# EAGLE board cv08_dobes (EAGLE 7.7.0)
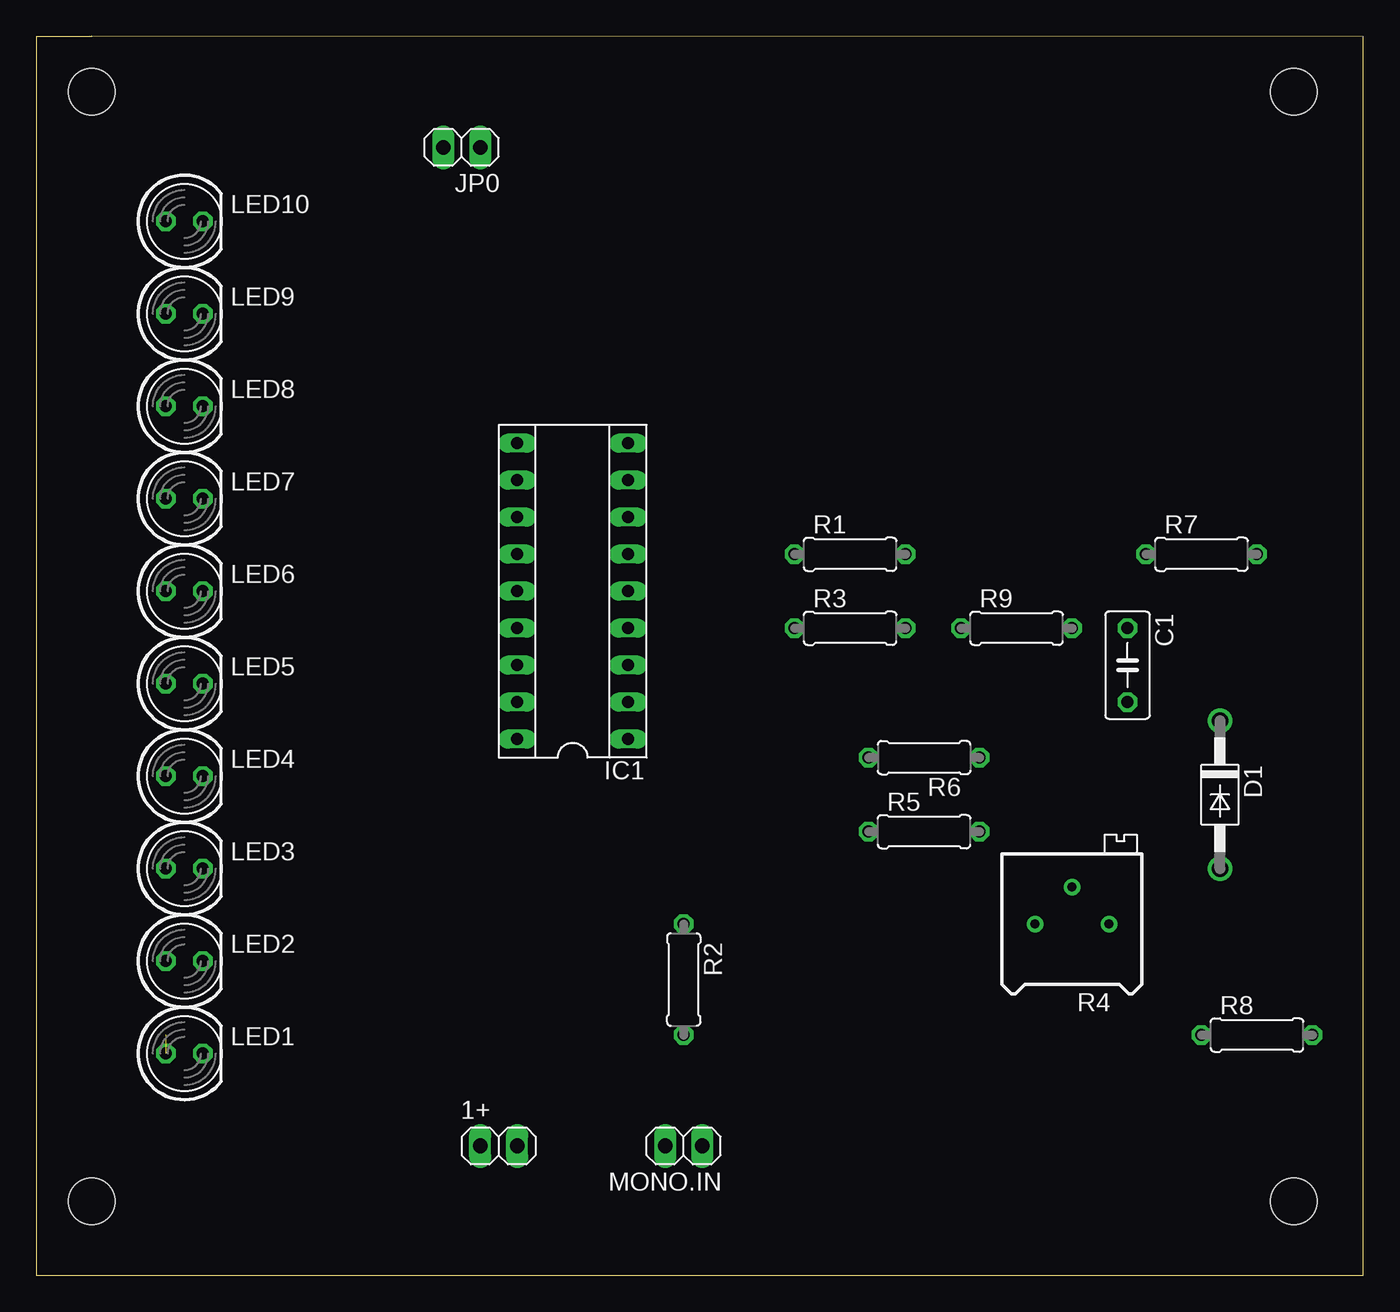
[diagram p0: board, top side]
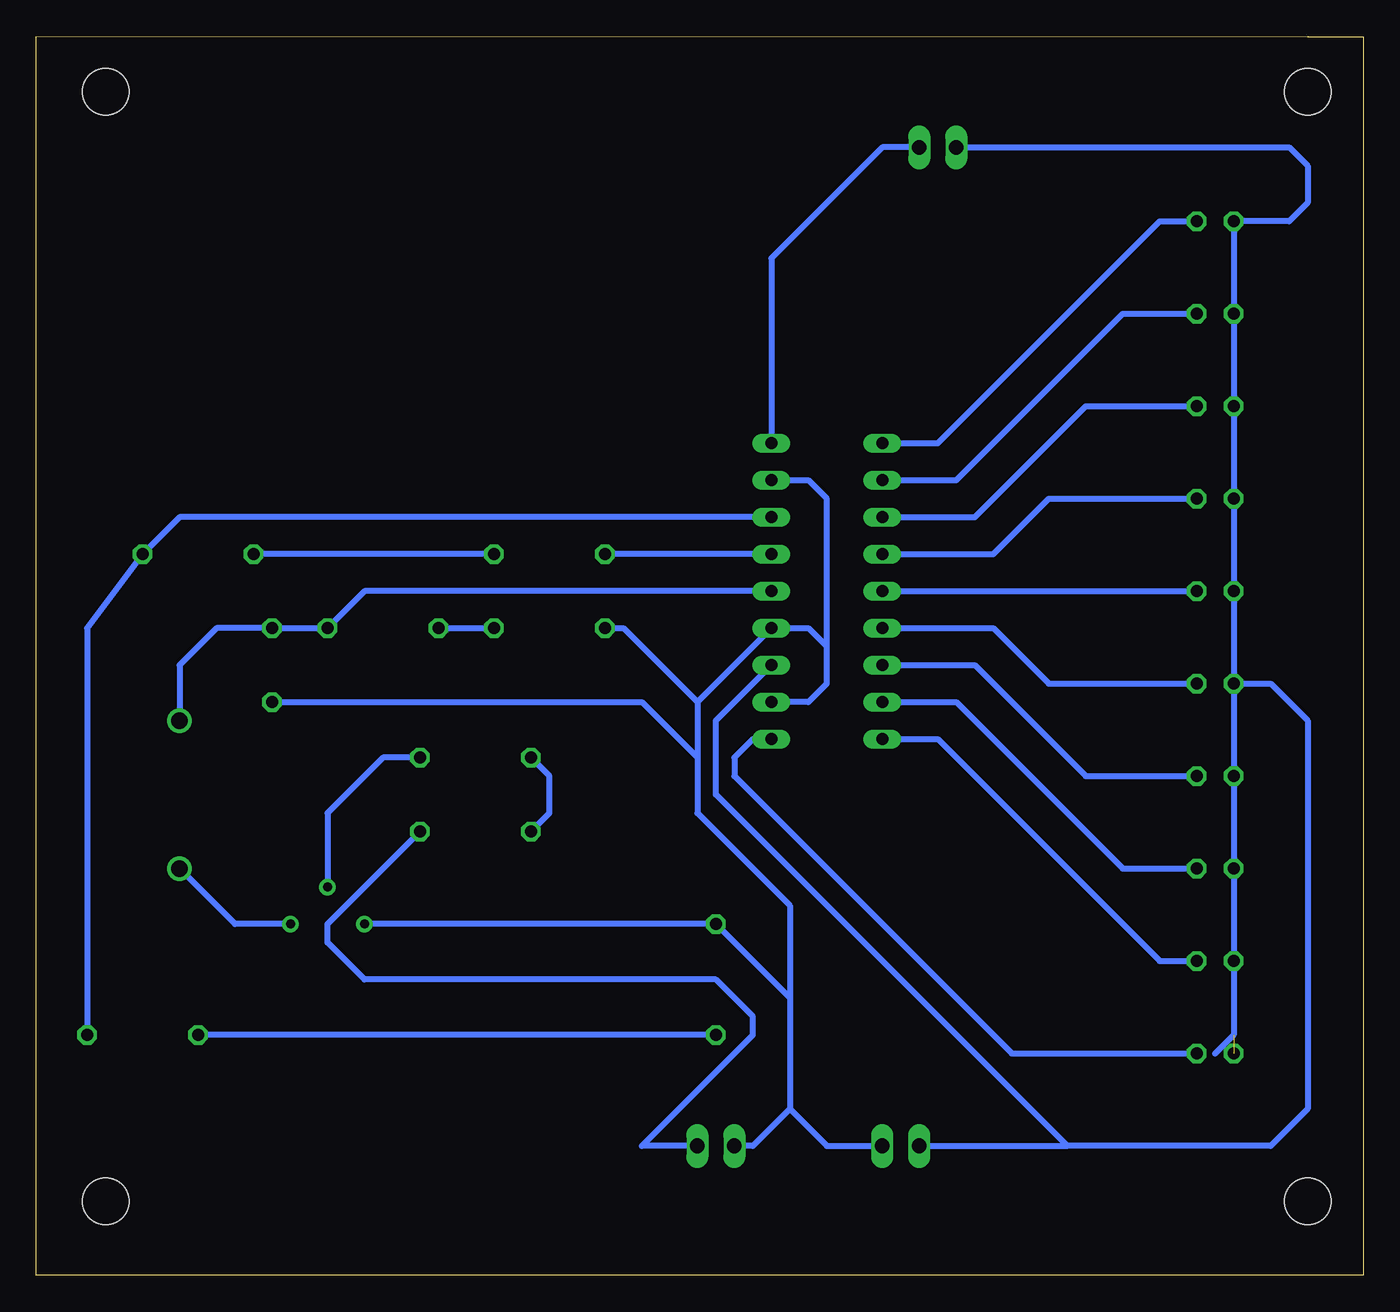
[diagram p1: board, bottom side, seen from below]

Size 91.11 x 85.09 mm. Coordinates in mm from the lower left corner, seen from the top.
Outline: 0,0 91.11,0 91.11,85.08 3.81,85.09 3.81,85.08 0,85.08 0,0
Copper layers (1*16): Top 0.035mm / dielectric 1.5mm / Bottom 0.035mm
Design rules "default": minimum track width 10mil, minimum drill 24mil, track to track 8mil, track to pad 8mil, pad to pad 8mil, via to via 8mil, smd to smd 8mil, copper to edge 40mil, drill to drill 8mil, minimum pad ring 10mil, minimum via ring 8mil, stop-mask expansion 4mil, vias tented up to drill 0mil, thermal gap 10mil
Holes 3.2 mm at 3.81,81.28 86.36,81.28 86.36,5.08 3.81,5.08

## Footprints (pad centres in the part's own frame; a part is rotated, then mirrored left to right if it is on the bottom)
1X02 = drill 1.016 long: 1 -1.27,0; 2 1.27,0
C050-030X075 = drill 0.813 octagon: 1 -2.54,0; 2 2.54,0
DO41-10 = drill 1.118: A 5.08,0; C -5.08,0
SOCKET-18 = drill 0.813 long: 1 -10.16,-3.81; 2 -7.62,-3.81; 3 -5.08,-3.81; 4 -2.54,-3.81; 5 0,-3.81; 6 2.54,-3.81; 7 5.08,-3.81; 8 7.62,-3.81; 9 10.16,-3.81; 10 10.16,3.81; 11 7.62,3.81; 12 5.08,3.81; 13 2.54,3.81; 14 0,3.81; 15 -2.54,3.81; 16 -5.08,3.81; 17 -7.62,3.81; 18 -10.16,3.81
LED5MM = drill 0.813 octagon: A -1.27,0; K 1.27,0
0207/7 = drill 0.813 octagon: 1 -3.81,0; 2 3.81,0
RTRIM64P = drill 0.61: 1 0,-2.54; 2 2.54,0; 3 0,2.54

## Placement (x,y rotation side)
1+  [1X02]  31.75,8.89 0 top
C1  100nF  [C050-030X075]  74.93,41.91 270 top
D1  1N4004  [DO41-10]  81.28,33.02 270 top
IC1  LM3915N  [SOCKET-18]  36.83,46.99 90 top
JP0  Jumper  [1X02]  29.21,77.47 180 top
LED1  [LED5MM]  10.16,15.24 0 top
LED2  [LED5MM]  10.16,21.59 0 top
LED3  [LED5MM]  10.16,27.94 0 top
LED4  [LED5MM]  10.16,34.29 0 top
LED5  [LED5MM]  10.16,40.64 0 top
LED6  [LED5MM]  10.16,46.99 0 top
LED7  [LED5MM]  10.16,53.34 0 top
LED8  [LED5MM]  10.16,59.69 0 top
LED9  [LED5MM]  10.16,66.04 0 top
LED10  [LED5MM]  10.16,72.39 0 top
MONO.IN  [1X02]  44.45,8.89 180 top
R1  5K  [0207/7]  55.88,49.53 0 top
R2  0K5  [0207/7]  44.45,20.32 270 top
R3  50K  [0207/7]  55.88,44.45 0 top
R4  10K  [RTRIM64P]  71.12,24.13 90 top
R5  5K  [0207/7]  60.96,30.48 0 top
R6  5K  [0207/7]  60.96,35.56 180 top
R7  5K  [0207/7]  80.01,49.53 0 top
R8  0K5  [0207/7]  83.82,16.51 0 top
R9  50K  [0207/7]  67.31,44.45 0 top

## Library data of the parts
1+ JP0 MONO.IN = pinhead
C1 R1-R9 = rcl
D1 = diode
IC1 = ic-package
LED1-LED10 = led

## Nets
N$1: MONO.IN.1 R5.2
N$2: R4.2 R6.1
N$3: D1.A R4.1
N$4: C1.1 D1.C IC1.5 R9.2
N$5: IC1.7 R7.2 R8.2
N$6: IC1.9 JP0.1
N$7: IC1.6 R1.1
N$8: R5.1 R6.2
N$9: 1+.2 C1.2 IC1.2 IC1.4 IC1.8 MONO.IN.2 R2.1 R3.1 R4.3
N$10: 1+.1 IC1.3 JP0.2 LED1.A LED2.A LED3.A LED4.A LED5.A LED6.A LED7.A LED8.A LED9.A LED10.A
N$11: IC1.1 LED1.K
N$12: IC1.18 LED2.K
N$13: IC1.17 LED3.K
N$14: IC1.16 LED4.K
N$15: IC1.15 LED5.K
N$16: IC1.14 LED6.K
N$17: IC1.13 LED7.K
N$18: IC1.12 LED8.K
N$19: IC1.11 LED9.K
N$20: IC1.10 LED10.K
N$21: R2.2 R8.1
N$22: R1.2 R7.1
N$23: R3.2 R9.1

## Tracks (layer width: path | path; a pad name or v marks a point on that pad's centre or on a via)
N$1
  Bottom 0.406: MONO.IN.1 49.53,8.89 41.91,16.51 41.91,17.78 44.45,20.32 68.58,20.32 71.12,22.86 71.12,24.13 R5.2
N$2
  Bottom 0.406: R6.1 67.31,35.56 71.12,31.75 R4.2
N$3
  Bottom 0.406: R4.1 77.47,24.13 D1.A
N$4
  Bottom 0.406: D1.C 81.28,41.91 78.74,44.45 C1.1 R9.2 68.58,46.99 IC1.5
N$5
  Bottom 0.406: R8.2 87.63,44.45 R7.2 81.28,52.07 IC1.7
N$6
  Bottom 0.406: JP0.1 33.02,77.47 40.64,69.85 IC1.9
N$7
  Bottom 0.406: IC1.6 R1.1
N$8
  Bottom 0.406: R5.1 55.88,31.75 55.88,34.29 R6.2
N$9
  Bottom 0.406: 45.72,39.37 IC1.4 38.1,44.45 36.83,43.18 36.83,45.72 | R3.1 50.8,44.45 45.72,39.37 | 45.72,39.37 45.72,35.56 | 39.37,11.43 36.83,8.89 1+.2 | 39.37,19.05 R2.1 R4.3 | 39.37,19.05 39.37,11.43 | C1.2 49.53,39.37 45.72,35.56 | 45.72,35.56 45.72,31.75 39.37,25.4 39.37,19.05 | 39.37,11.43 41.91,8.89 MONO.IN.2 | IC1.8 38.1,54.61 36.83,53.34 36.83,40.64 38.1,39.37 IC1.2
N$10  (1 unrouted)
  Bottom 0.406: LED5.A LED6.A LED7.A LED8.A LED9.A LED10.A 5.08,72.39 3.81,73.66 3.81,76.2 5.08,77.47 JP0.2 | LED5.A LED4.A LED3.A LED2.A 8.89,16.51 10.16,15.24 | 1+.1 20.32,8.89 | LED5.A 6.35,40.64 3.81,38.1 3.81,11.43 6.35,8.89 20.32,8.89 | 20.32,8.89 44.45,33.02 44.45,38.1 IC1.3
N$11
  Bottom 0.406: IC1.1 41.91,36.83 43.18,35.56 43.18,34.29 24.13,15.24 LED1.K
N$12
  Bottom 0.406: IC1.18 29.21,36.83 13.97,21.59 LED2.K
N$13
  Bottom 0.406: IC1.17 27.94,39.37 16.51,27.94 LED3.K
N$14
  Bottom 0.406: IC1.16 26.67,41.91 19.05,34.29 LED4.K
N$15
  Bottom 0.406: IC1.15 25.4,44.45 21.59,40.64 LED5.K
N$16
  Bottom 0.406: IC1.14 LED6.K
N$17
  Bottom 0.406: IC1.13 25.4,49.53 21.59,53.34 LED7.K
N$18
  Bottom 0.406: IC1.12 26.67,52.07 19.05,59.69 LED8.K
N$19
  Bottom 0.406: IC1.11 27.94,54.61 16.51,66.04 LED9.K
N$20
  Bottom 0.406: IC1.10 29.21,57.15 13.97,72.39 LED10.K
N$21
  Bottom 0.406: R2.2 R8.1
N$22
  Bottom 0.406: R1.2 R7.1
N$23
  Bottom 0.406: R9.1 R3.2